# Altium PCB ThreadModule.PcbDoc (part 1 of 2)
Units mm, origin at the board's own origin, x right, y up, seen from the top; angles counter-clockwise.
Board outline 40 x 67.5 mm, 4 copper layers (SIG1, PLANE1, SIG3, SIG4), stack 1.58 mm thick; 114 components, 89 nets, 388 pads, 426 vias.
Unrouted connection lines stored in the file: 2.
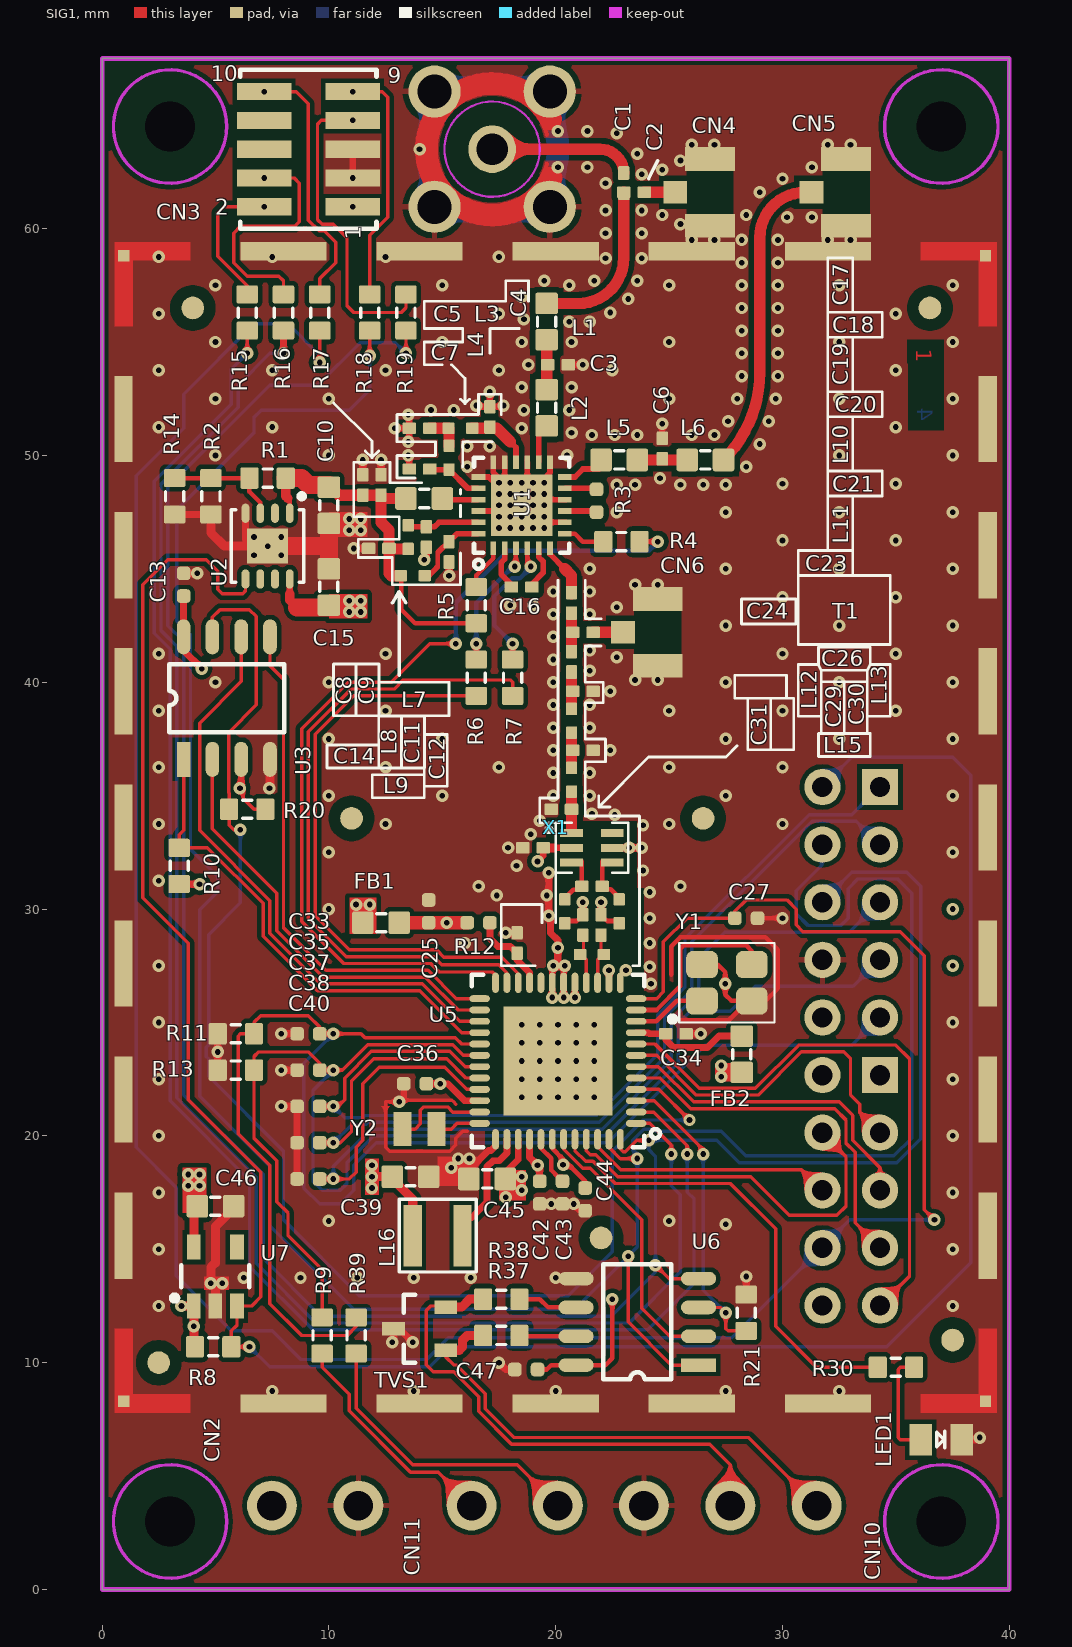
[diagram p0: SIG1 view]
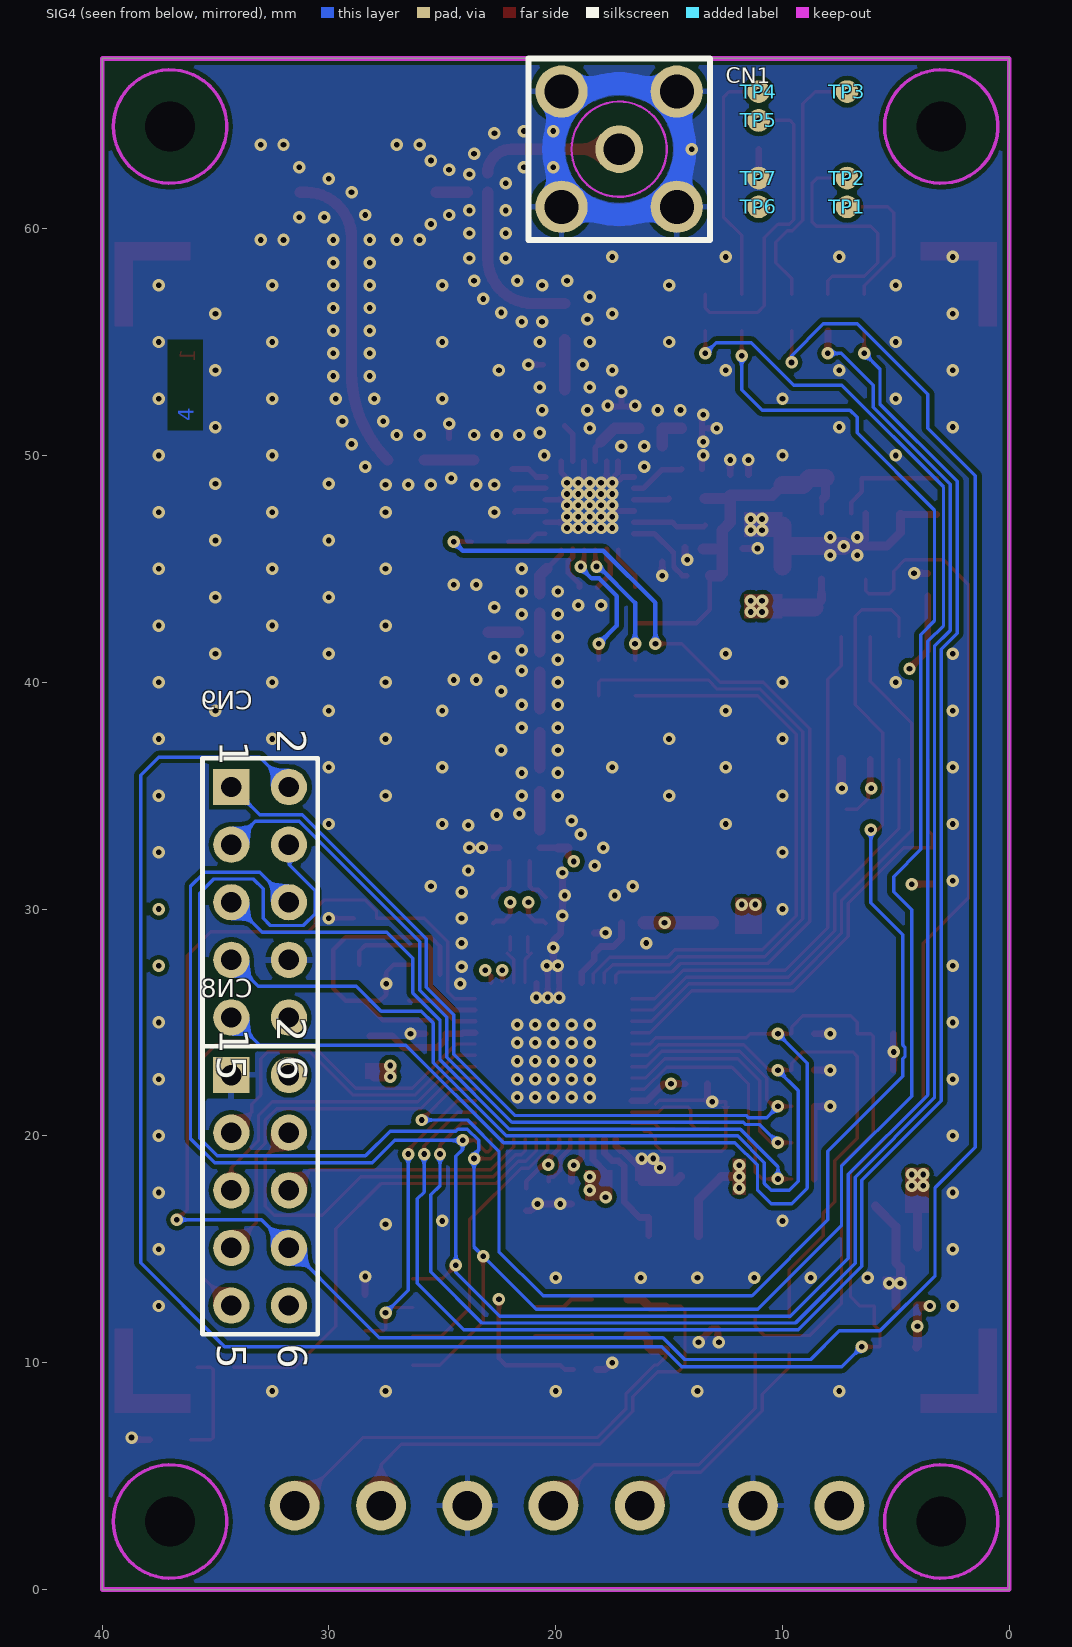
[diagram p1: SIG4 view, seen from below]
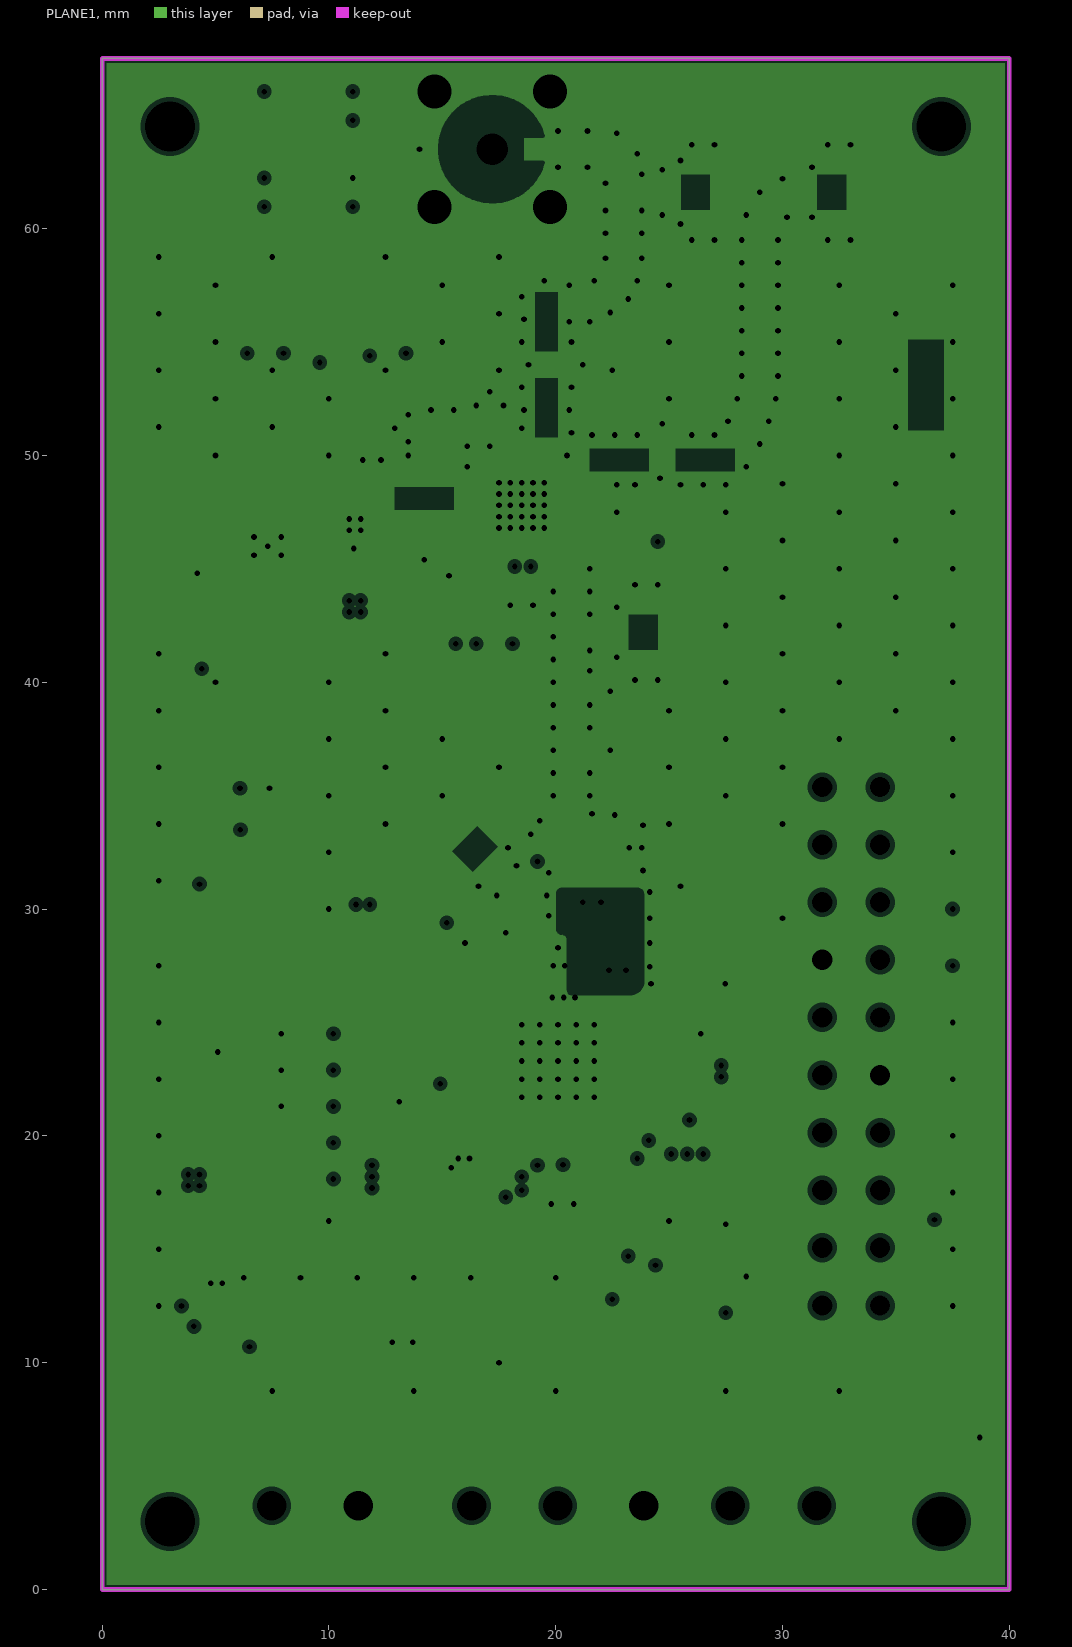
[diagram p2: PLANE1, clearances drawn from the general rule]
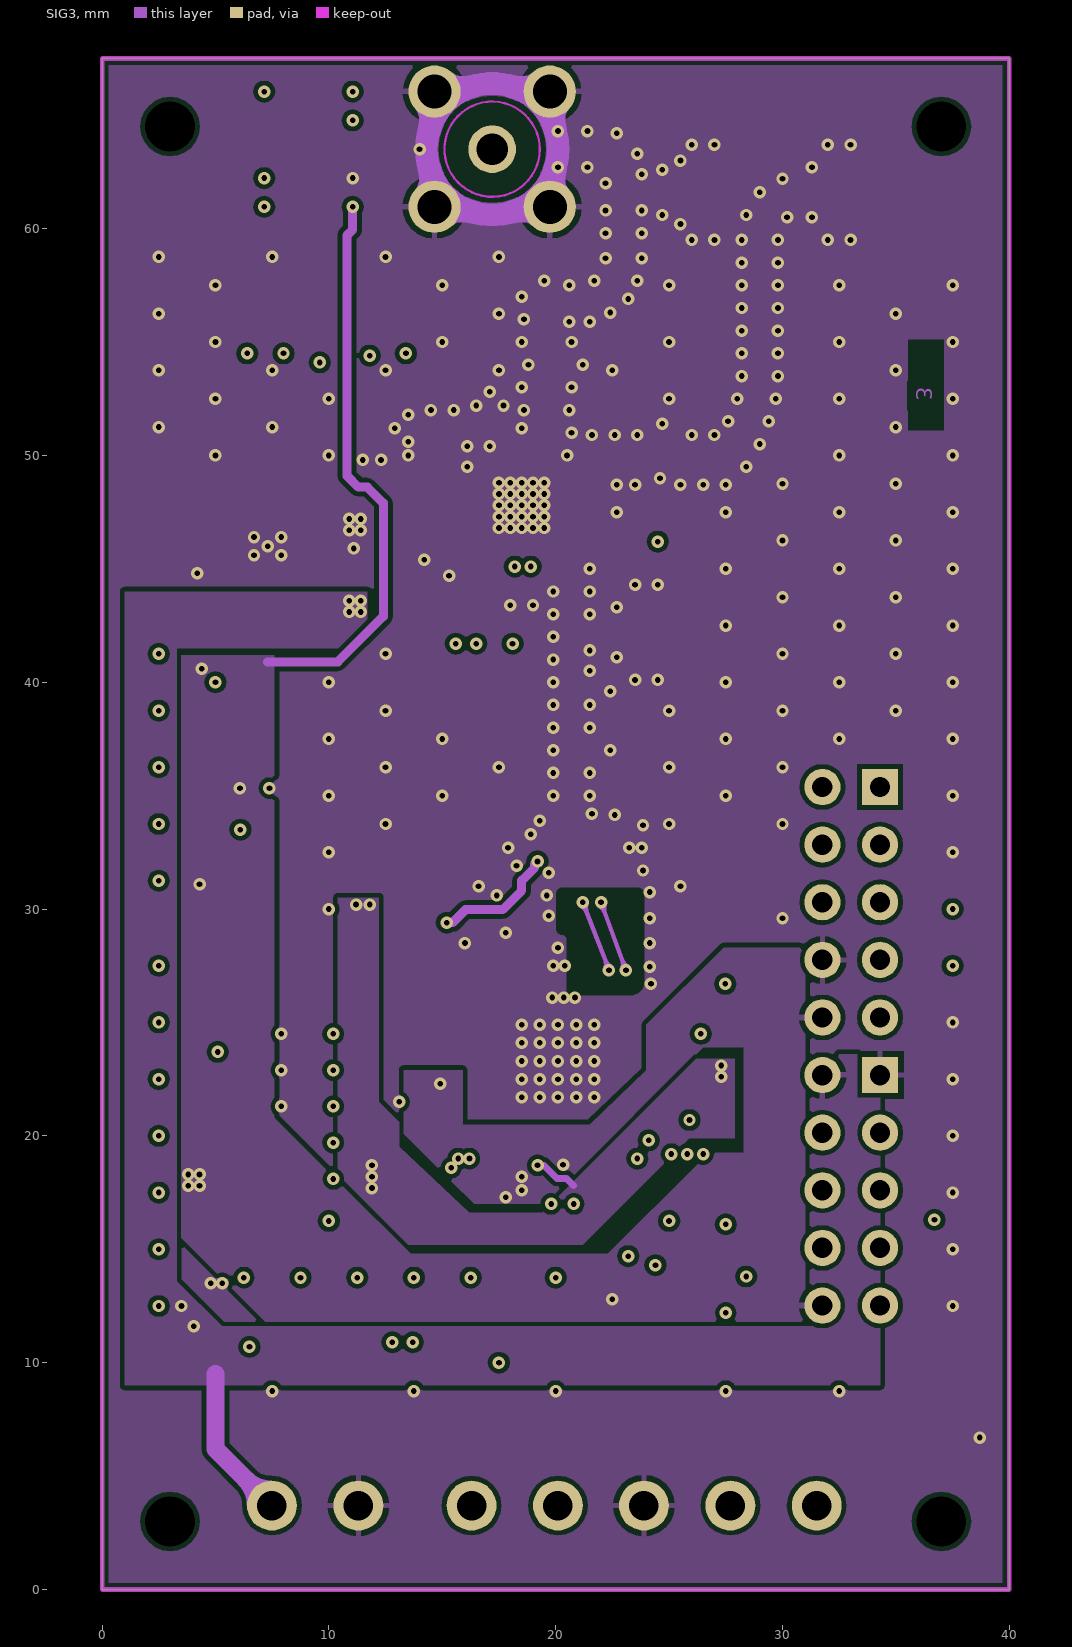
[diagram p3: SIG3]

## Layer stack, top to bottom
Top Solder: solder mask 0.01, Solder Resist, Dk 3.5
SIG1: signal copper 0.036
Dielectric 1: prepreg 0.3, FR-4, Dk 4.2
PLANE1: plane copper 0.018, net GND
Dielectric 2: core 0.872, Dk 4.2
SIG3: signal copper 0.018
Dielectric 3: prepreg 0.3, Dk 4.2
SIG4: signal copper 0.036
Bottom Solder: solder mask 0.01, Solder Resist, Dk 3.5

## Board outline
0,0 40,0 40,67.5 0,67.5

## Design rules (kind name [scope] priority, off if disabled: settings)
AssemblyTestpoint [(IsPad And (OnTopLayer Or OnBottomLayer)) Or (IsVia) Or (IsPad And OnMultiLayer)] p1: testpointundercomponent=FALSE minsize=0.5 maxsize=10 preferedsize=1 minholesize=0 maxholesize=1 preferedholesize=0 testpointgrid=0.025 usegrid=FALSE gridtolerance=0 allowsidebottom=TRUE
BoardOutlineClearance [All] p1: gap=0.2 ignorepadtopadclearanceinfootprint=FALSE
Clearance Clearance_RFO [WithinRoom('ROOM_RFO')] p1: gap=0.125 ignorepadtopadclearanceinfootprint=FALSE
Clearance Clearance_RF [InNet('ANT') or InNet('RF*') vs InNet('GND')] p2: gap=0.25 ignorepadtopadclearanceinfootprint=FALSE
Clearance Clearance_Poly [Inpolygon] p3: gap=0.2 ignorepadtopadclearanceinfootprint=FALSE
Clearance Clearance_General [All] p4: gap=0.15 ignorepadtopadclearanceinfootprint=FALSE
ComponentClearance [All] p1: gap=0.2 collisioncheckmode=3 verticalgap=0.25 showdistances=TRUE
HoleSize [All] p1: absolutevalues=TRUE maxlimit=3.2 minlimit=0.2 maxpercent=80.000 minpercent=20.000
HoleToHoleClearance [All] p1: gap=0.25 allowstackedmicrovias=TRUE
MinimumSolderMaskSliver [All] p1: minsoldermaskwidth=0.05
NetAntennae [not IsTestpoint] p1: netantennaetolerance=0
PlaneClearance [All] p1: clearance=0.2
PlaneConnect PlaneConnect_1 [(ObjectKind = 'Pad') And (Component = 'CN1')] p1: planeconnectstyle=Direct reliefexpansion=0.508 reliefentries=4 reliefconductorwidth=0.254 reliefairgap=0.254
PlaneConnect [not ((ObjectKind = 'Pad') And (Component = 'CN1'))] p2: pad.planeconnectstyle=Relief pad.reliefexpansion=0.5 pad.reliefentries=4 pad.reliefconductorwidth=0.25 pad.reliefairgap=0.25 via.planeconnectstyle=Direct via.reliefexpansion=0.508 via.reliefentries=4 via.reliefconductorwidth=0.254 via.reliefairgap=0.254
PolygonConnect [All] p1: thpad.connectstyle=Relief thpad.reliefconductorwidth=0.25 thpad.reliefentries=4 thpad.polygonreliefangle="90 Angle" thpad.airgapwidth=0.25 smdpad.connectstyle=Direct smdpad.reliefconductorwidth=0.254 smdpad.reliefentries=4 smdpad.polygonreliefangle="90 Angle" smdpad.airgapwidth=0.254 via.connectstyle=Direct via.reliefconductorwidth=0.254 via.reliefentries=4 via.polygonreliefangle="90 Angle" via.airgapwidth=0.254
RoomDefinition ThreadModule [InComponentClass('ThreadModule')] p1: confinementstyle=ConfineIn formatcopy=TRUE lockcomponents=FALSE outline 19.4,30 22.8,30 22.8,25.8 19.4,25.8
RoutingVias [All] p1: holewidth=0.25 width=0.55 viastyle="Through Hole" minholewidth=0.25 minwidth=0.55 maxholewidth=0.25 maxwidth=0.55
SilkToSolderMaskClearance [IsPad] p1: minsilkscreentomaskgap=0.1 clearancetoexposedcopper=TRUE
SolderMaskExpansion SolderMaskExpansion_TP_BOTTOM [isvia AND TestpointBottom] p1: expansion=-100 istentingtop=FALSE useseparateexpansions=TRUE expansionbottom=0 istentingbottom=FALSE
SolderMaskExpansion SolderMaskExpansion_Via [isvia and not IsTestpoint] p2: expansion=-100 istentingtop=FALSE
SolderMaskExpansion SolderMaskExpansion_General [All] p3: expansion=0.1 istentingtop=FALSE
Width [All] p1: maxlimit=2 minlimit=0.15 preferedwidth=0.15 minimp=50.000000 maximp=50.000000 favimp=50.000000
21 further rules are at their usual default settings.

## Components (designator, comment, footprint, x,y, rotation, side; value= is the part's Value field where it differs from the comment)
C1 "TBD TBD 5% C0G" CAPC1005X55L 23,62 r270 top value=TBD
C2 "TBD TBD 5% C0G" CAPC1005X55L 23.45,61.6 r0 top value=TBD
C3 "3.3pF 16V 5% C0G" CAPC1005X55L 20.1,54 r180 top value=3.3pF
C4 "3.3pF 16V 5% C0G" CAPC1005X55L 17.1,51.7 r90 top value=3.3pF
C5 "10pF 50V 5% C0G" CAPC1005X55L 14,51.2 r180 top value=10pF
C6 "3.3pF 16V 5% C0G" CAPC1005X55L 24.7,50.3 r270 top value=3.3pF
C7 "TBD TBD 5% C0G" CAPC1005X55L 14,49.4 r180 top value=TBD
C8 "1nF 16V 20% X7R" CAPC1005X55L 11.5,48.7 r270 top value=1nF
C9 "33pF 50V 5% C0G" CAPC1005X55L 12.3,48.7 r270 top value=33pF
C10 "4.7uF 6.3V 20% X5R" CAPC1608X90N 10,47.8 r270 top value=4.7uF
C11 "22pF 50V 5% C0G" CAPC1005X55L 14.3,46.4 r90 top value=22pF
C12 "100pF 50V 5% C0G" CAPC1005X55L 15.3,45.75 r90 top value=100pF
C13 "0.1uF 25V 20% X5R" CAPC1005N 3.6,44.3 r90 top value=0.1uF
C14 "10nF 50V 20% X7R" CAPC1005X55L 12.2,45.9 r0 top value=10nF
C15 "4.7uF 6.3V 20% X5R" CAPC1608X90N 10,44.2 r90 top value=4.7uF
C16 "3.3pF 16V 5% C0G" CAPC1005X55L 18.5,44.2 r0 top value=3.3pF
C17 "TBD TBD 5% C0G" CAPC1005X55L 20.7,43.5 r270 top value=TBD
C18 "TBD TBD 5% C0G" CAPC1005X55L 21.2,42.2 r0 top value=TBD
C19 "TBD TBD 5% C0G" CAPC1005X55L 20.7,40.9 r90 top value=TBD
C20 "TBD TBD 5% C0G" CAPC1005X55L 21.2,39.6 r0 top value=TBD
C21 "3.6pF 16V 5% C0G" CAPC1005X55L 21.2,37 r0 top value=3.6pF
C23 "3.6pF 16V 5% C0G" CAPC1005X55L 20.25,34.4 r180 top value=3.6pF
C24 "56pF 50V 5% C0G" CAPC1005X55L 19,32.7 r0 top value=56pF
C25 "0.22uF 10V 20% X7R" CAPC1005N 14.4,29.9 r270 top value=0.22uF
C26 "3.9pF 16V 5% C0G" CAPC1005X55L 21.6,31 r180 top value=3.9pF
C27 "0.1uF 25V 20% X5R" CAPC1005N 28.4,29.6 r180 top value=0.1uF
C29 "1.8pF 16V 5% C0G" CAPC1005X55L 21.2,29.3 r270 top value=1.8pF
C30 "1.8pF 16V 5% C0G" CAPC1005X55L 22,29.3 r270 top value=1.8pF
C31 "56pF 50V 5% C0G" CAPC1005X55L 18.3,28.5 r270 top value=56pF
C33 "0.1uF 25V 20% X5R" CAPC1005N 9.1,24.5 r0 top value=0.1uF
C34 "100pF 50V 5% C0G" CAPC1005X55L 25.3,24.5 r180 top value=100pF
C35 "0.1uF 25V 20% X5R" CAPC1005N 9.1,22.9 r0 top value=0.1uF
C36 "0.1uF 25V 20% X5R" CAPC1005N 13.8,22.3 r180 top value=0.1uF
C37 "0.1uF 25V 20% X5R" CAPC1005N 9.1,21.3 r0 top value=0.1uF
C38 "0.1uF 25V 20% X5R" CAPC1005N 9.1,19.7 r0 top value=0.1uF
C39 "4.7uF 6.3V 20% X5R" CAPC1608X90N 13.6,18.2 r0 top value=4.7uF
C40 "0.1uF 25V 20% X5R" CAPC1005N 9.1,18.1 r0 top value=0.1uF
C42 "0.1uF 25V 20% X5R" CAPC1005N 19.3,17.5 r90 top value=0.1uF
C43 "1uF 6.3V 20% X5R" CAPC1005N 20.3,17.5 r270 top value=1uF
C44 "1uF 6.3V 20% X5R" CAPC1005N 21.3,17.2 r270 top value=1uF
C45 "4.7uF 6.3V 20% X5R" CAPC1608X90N 16.975,18.1 r180 top value=4.7uF
C46 "4.7uF 6.3V 20% X5R" CAPC1608X90N 5,16.9 r0 top value=4.7uF
C47 "1uF 6.3V 20% X5R" CAPC1005N 18.7,9.7 r180 top value=1uF
CN1 "SMARA CONNECTOR" 0733910320 17.2,63.5 r270 bottom locked
CN2 "EK381-02P" EK381-02P 7.49,3.7 r0 top
CN3 "20021121-00010C4LF" HDR2X5 9.1,63.5 r90 top
CN4 "U.FL-R-SMT-1" U.FL-R-SMT-1 26.8,61.6 r270 top
CN5 "U.FL-R-SMT-1" U.FL-R-SMT-1 32.8,61.6 r270 top
CN6 "U.FL-R-SMT-1" U.FL-R-SMT-1 24.5,42.2 r270 top
CN8 "Header, Female, 2x5, 0.1\", Vertical" "HDR2x5-0.1\"-F" 33.03,17.6 r270 bottom locked
CN9 "Header, Female, 2x5, 0.1\", Vertical" "HDR2x5-0.1\"-F" 33.03,30.3 r270 bottom locked
CN10 "EK381-03P" EK381-03P 23.89,3.7 r0 top
CN11 "EK381-02P" EK381-02P 16.29,3.7 r0 top
FB1 "BLM18EG601SN1" INDC1608X95N 12.3,29.4 r0 top value=600Ohms@100MHz
FB2 "BLM18EG601SN1" INDC1608X95N 28.2,23.6 r270 top value=600Ohms@100MHz
L1 "LQG18HN6N8J00D" INDC1608X95N 19.6,55.9 r90 top value=6.8nH
L2 "LQG18HN6N8J00D" INDC1608X95N 19.6,52.1 r90 top value=6.8nH
L3 "LQG15HN3N0S02D" INDC1005X55L 15.8,51.2 r180 top value=3.0nH
L4 "LQG15HN1N3S02D" INDC1005X55L 15.3,49.9 r90 top value=1.3nH
L5 "LQG18HN6N8J00D" INDC1608X95N 22.8,49.8 r0 top value=6.8nH
L6 "LQG18HN6N8J00D" INDC1608X95N 26.6,49.8 r0 top value=6.8nH
L7 "LQG18HN6N8J00D" INDC1608X95N 14.2,48.1 r180 top value=6.8nH
L8 "LQG15HN4N7S02D" INDC1005X55L 13.5,46.4 r270 top value=4.7nH
L9 "LQW15AN3N3B8ZD" INDC1005X55L 13.7,44.7 r180 top value=3.3nH
L10 "TBD" INDC1005X55L 20.7,38.3 r90 top
L11 "LQW15AN9N1G8ZD" INDC1005X55L 20.7,35.7 r90 top value=9.1nH
L12 "LQW15AN3N3B8ZD" INDC1005X55L 20.4,29.9 r90 top value=3.3nH
L13 "LQW15AN3N3B8ZD" INDC1005X55L 22.8,29.9 r90 top value=3.3nH
L15 "LQW15AN18NG80D" INDC1005X55L 21.6,28 r0 top value=18nH
L16 "LQH3NPN4R7MJRL" INDW3030N 14.8,15.6 r180 top value=4.7uH/710mA
LED1 "LED, red" LEDC2012N 37,6.6 r0 top
R1 "100k 1% 63mW" RESC1608X40N 7.3,49 r0 top value=100k
R2 "68k 1% 63mW" RESC1608X40N 4.8,48.2 r90 top value=68k
R3 "0R 50mW" RESC1005X40N 21.8,48 r270 top value=0R
R4 "1k 1% 63mW" RESC1608X40N 22.9,46.2 r0 top value=1k
R5 "1k 1% 63mW" RESC1608X40N 16.5,43.4 r270 top value=1k
R6 "1k 1% 63mW" RESC1608X40N 16.5,40.2 r270 top value=1k
R7 "1k 1% 63mW" RESC1608X40N 18.1,40.2 r270 top value=1k
R8 "100k 1% 63mW" RESC1608X40N 4.9,10.7 r180 top value=100k
R9 "68k 1% 63mW" RESC1608X40N 9.7,11.2 r90 top value=68k
R10 "100k 1% 63mW" RESC1608X40N 3.4,31.9 r90 top value=100k
R11 "10k 1% 63mW" RESC1608X40N 5.9,24.5 r180 top value=10k
R12 "0R 50mW" RESC1005X40N 16.6,29.4 r0 top value=0R
R13 "10k 1% 63mW" RESC1608X40N 5.9,22.9 r180 top value=10k
R14 "120k 1% 63mW" RESC1608X40N 3.2,48.2 r90 top value=120k
R15 "47R 1%" RESC1608X40N 6.4,56.3 r270 top value=47R
R16 "47R 1%" RESC1608X40N 8,56.3 r270 top value=47R
R17 "47R 1%" RESC1608X40N 9.6,56.3 r270 top value=47R
R18 "47R 1%" RESC1608X40N 11.8,56.3 r270 top value=47R
R19 "47R 1%" RESC1608X40N 13.4,56.3 r270 top value=47R
R20 "100k 1% 63mW" RESC1608X40N 6.4,34.4 r180 top value=100k
R21 "100k 1% 63mW" RESC1608X40N 28.4,12.2 r270 top value=100k
R30 "390R 1% 63mW" RESC1608X40N 35,9.8 r0 top value=390R
R37 "10R 1% 63mW" RESC1608X40N 17.6,11.2 r0 top value=10R
R38 "10R 1% 63mW" RESC1608X40N 17.6,12.8 r0 top value=10R
R39 "68k 1% 63mW" RESC1608X40N 11.2,11.2 r90 top value=68k
T1 "0900BL15C050" BALC2012 21.6,32.7 r0 top
TP1 "Test point" TP 7.15,60.96 r90 bottom
TP2 "Test point" TP 7.15,62.23 r90 bottom
TP3 "Test point" TP 7.15,66.04 r90 bottom
TP4 "Test point" TP 11.05,66.04 r90 bottom
TP5 "Test point" TP 11.05,64.77 r90 bottom
TP6 "Test point" TP 11.05,60.96 r90 bottom
TP7 "Test point" TP 11.05,62.23 r90 bottom
TVS1 "PESD12VL2BT,215" SOT95P230X110-3N 14,11.5 r180 top value=12V
U1 "SE2435L-R" QFN50P400X400X90-25N 18.5,47.8 r90 top
U2 "LD59100PUR" SON65P300X300X90-9N-2 7.3,46 r270 top
U3 "MX25R1635FM1IL0" SOIC127P600X175-8N 5.5,39.3 r90 top
U5 "EFR32MG13P733F512GM48-C" QFN50P700X700X100-49N 20.1,23.3 r180 top
U6 "ST3485EBDR" SOIC127P600X175-8N 23.6,11.8 r180 top
U7 "MCP1711T-33I/OT" SOT95P284X122-5N 5,13.8 r90 top
X1 "2118732-2" 2118732 39.45,7.8 r90 top locked
Y1 "ECS-384-10-33B-CKY" XTAL3225X60N 27.55,26.75 r90 top value="38.4MHz 10ppm CL=10pF ESR=40ohm"
Y2 "CM8V-T1A-32.768kHz-12.5pF-20PPM-TA-QC" XTAL2.0x1.2 14,20.3 r180 top value="32.768kHz 12.5pF"

## Footprints (in the part's own frame and the unit in brackets; to place one, negate y for a bottom-side part, rotate by r counter-clockwise, add the part's x,y. Pads: shape width x height; smd on the part's side, far side on the other; paste and mask are expansions set on the pad)
2118732 [mm]
  rect 0.8x3.8 smd: 1(0.4,31.45) 1(0.4,25.45) 1(0.4,19.45) 1(0.4,13.45) 1(0.4,7.45) 1(51.2,7.45) 1(51.2,13.45) 1(51.2,19.45) 1(51.2,25.45) 1(51.2,31.45)
  rect 0.5x0.5 smd: 1(0.5,38.5) 1(0.5,0.5) 1(51,0.5) 1(51,38.5)
  rect 3.8x0.8 smd: 1(7.8,38.5) 1(7.8,0.4) 1(13.8,38.5) 1(13.8,0.4) 1(19.8,38.5) 1(19.8,0.4) 1(25.8,38.5) 1(25.8,0.4) 1(31.8,0.4) 1(31.8,38.5) 1(37.8,0.4) 1(37.8,38.5) 1(43.8,0.4) 1(43.8,38.5)
  SIG1 region: 51.6,0 47.9,0 47.9,0.8 50.8,0.8 50.8,3.35 51.6,3.35
  SIG1 region: 51.6,38.9 47.9,38.9 47.9,38.1 50.8,38.1 50.8,35.55 51.6,35.55
  SIG1 region: 0,38.9 3.7,38.9 3.7,38.1 0.8,38.1 0.8,35.55 0,35.55
  SIG1 region: 0,0 3.7,0 3.7,0.8 0.8,0.8 0.8,3.35 0,3.35
0733910320 [mm] "RPSMA"
  round 2.3 hole 1.5: 1(-2.54,2.54) 2(2.54,2.54) 3(2.54,-2.54) 4(-2.54,-2.54)
  round 2.1 hole 1.4: 5(0,0)
  silkscreen extent -4,-4 4,4, body extent -11.7,-3.2 3.2,3.2, height 9.6
BALC2012 [mm] "Chip Balun, Body 2.0x1.2mm, IPC Medium Density"
  rect 1x0.35 smd: 1(-0.9,0.65) 2(-0.9,0) 3(-0.9,-0.65) 4(0.9,-0.65) 5(0.9,0) 6(0.9,0.65)
  silkscreen extent -2,-1.1 1.6,1.1, body extent -0.7,-1.1 0.7,1.1, height 0.8
CAPC1005N [mm] "Chip Capacitor, Body 1.0x0.5mm, IPC Medium Density"
  rrect50% 0.6x0.6 smd: 1(-0.5,0) 2(0.5,0)
  body extent -0.5,-0.25 0.5,0.25, height 0.5
CAPC1005X55L [mm] "Chip Capacitor, Body 1.0x0.5mm, IPC Medium Density"
  rrect20% 0.6x0.5 smd mask+0.06: 1(-0.45,0) 2(0.45,0)
  body extent -0.5,-0.25 0.5,0.25, height 0.5
CAPC1608X90N [mm] "Chip Capacitor, Body 1.6x0.8mm, IPC Medium Density"
  rrect20% 0.95x1 smd: 1(-0.8,0) 2(0.8,0)
  silkscreen extent -0.2,-0.4 0.2,0.4, body extent -0.85,-0.48 0.85,0.48, height 0.9
EK381-02P [mm]
  round 2.2 hole 1.3: 1L(0,0) 2L(3.81,0)
EK381-03P [mm]
  round 2.2 hole 1.3: 1L(0,0) 2L(3.81,0) 3L(7.62,0)
HDR2X5 [mm] "Connector; Header; 4x2 Position"
  rect 0.76x2.4 smd: 1(-2.54,-1.95) 2(-2.54,1.95) 3(-1.27,-1.95) 4(-1.27,1.95) 5(0,-1.95) 6(0,1.95) 7(1.27,-1.95) 8(1.27,1.95) 9(2.54,-1.95) 10(2.54,1.95)
  silkscreen extent -3.5,-3 3.5,3, body extent -3.17,-2.8 3.17,2.7, height 4.7
"HDR2x5-0.1\"-F" [mm] "TH FEMALE PIN H8.1 P2.54"
  rect 1.6x1.6 hole 0.9: 1(-5.08,-1.27)
  round 1.6 hole 0.9: 2(-5.08,1.27) 3(-2.54,-1.27) 4(-2.54,1.27) 5(0,-1.27) 6(0,1.27) 7(2.54,-1.27) 8(2.54,1.27) 9(5.08,-1.27) 10(5.08,1.27)
  silkscreen extent -6.35,-2.54 6.35,2.54, body extent -6.35,-2.54 6.35,2.54, height 8.55
INDC1005X55L [mm] "Chip Inductor, Body 1.0x0.5mm, IPC Medium Density"
  rrect20% 0.55x0.5 smd mask+0.06: 1(-0.525,0) 2(0.525,0)
  body extent -0.5,-0.25 0.5,0.25, height 0.55
INDC1608X95N [mm] "Chip Inductor, Body 1.6x0.8mm, IPC Medium Density"
  rrect20% 0.95x1 smd: 1(-0.8,0) 2(0.8,0)
  silkscreen extent -0.2,-0.4 0.2,0.4, body extent -0.85,-0.48 0.85,0.48, height 0.95
INDW3030N [mm] "Inductor, Body 3.0x3.0mm, IPC Medium Density"
  rect 0.8x2.7 smd: 1(-1.1,0) 2(1.1,0)
  silkscreen extent -1.7,-1.6 1.7,1.6, body extent -1.6,-1.6 1.6,1.6, height 1.2
LEDC2012N [mm] "Chip LED, Body 2.0x1.3mm, IPC Medium Density"
  rect 1x1.4 smd: 1(-0.9,0) 2(0.9,0)
  silkscreen extent -0.2,-0.35 0.15,0.38, body extent -1.07,-0.7 1.07,0.7, height 0.65
QFN50P400X400X90-25N [mm] "QFN,0.50mm pitch,square;24 pin,4.00mm L X 4.00mm W X 0.85mm H body (w/thermal tab)"
  rect 2.7x2.7 smd paste-5 mask+0: 0(0,0)
  rect 0.6x0.25 smd paste+0 mask+0.07: 1(-1.9,1.25) 2(-1.9,0.75) 3(-1.9,0.25) 4(-1.9,-0.25) 5(-1.9,-0.75) 6(-1.9,-1.25) 13(1.9,-1.25) 14(1.9,-0.75) 15(1.9,-0.25) 16(1.9,0.25) 17(1.9,0.75) 18(1.9,1.25)
  rect 0.25x0.6 smd paste+0 mask+0.07: 7(-1.25,-1.9) 8(-0.75,-1.9) 9(-0.25,-1.9) 10(0.25,-1.9) 11(0.75,-1.9) 12(1.25,-1.9) 19(1.25,1.9) 20(0.75,1.9) 21(0.25,1.9) 22(-0.25,1.9) 23(-0.75,1.9) 24(-1.25,1.9)
  silkscreen extent -2.8,-2.1 2.1,2.1, body extent -2,-2 2,2, height 0.8
QFN50P700X700X100-49N [mm] "QFN,0.50mm pitch,square;48 pin,7.00mm L X 7.00mm W X 1.0mm H body (w/thermal tab)"
  rect 4.8x4.8 smd paste-50: 0(0,0)
  oval 0.9x0.3 smd paste-0.03 mask+0.07: 1(-3.45,2.75) 2(-3.45,2.25) 3(-3.45,1.75) 4(-3.45,1.25) 5(-3.45,0.75) 6(-3.45,0.25) 7(-3.45,-0.25) 8(-3.45,-0.75) 9(-3.45,-1.25) 10(-3.45,-1.75) 11(-3.45,-2.25) 12(-3.45,-2.75) 25(3.45,-2.75) 26(3.45,-2.25) 27(3.45,-1.75) 28(3.45,-1.25) 29(3.45,-0.75) 30(3.45,-0.25) 31(3.45,0.25) 32(3.45,0.75) 33(3.45,1.25) 34(3.45,1.75) 35(3.45,2.25) 36(3.45,2.75)
  oval 0.3x0.9 smd paste-0.03 mask+0.07: 13(-2.75,-3.45) 14(-2.25,-3.45) 15(-1.75,-3.45) 16(-1.25,-3.45) 17(-0.75,-3.45) 18(-0.25,-3.45) 19(0.25,-3.45) 20(0.75,-3.45) 21(1.25,-3.45) 22(1.75,-3.45) 23(2.25,-3.45) 24(2.75,-3.45) 37(2.75,3.45) 38(2.25,3.45) 39(1.75,3.45) 40(1.25,3.45) 41(0.75,3.45) 42(0.25,3.45) 43(-0.25,3.45) 44(-0.75,3.45) 45(-1.25,3.45) 46(-1.75,3.45) 47(-2.25,3.45) 48(-2.75,3.45)
  silkscreen extent -4.5,-3.8 3.8,3.8, body extent -3.6,-3.6 3.6,3.6, height 1
RESC1005X40N [mm] "Chip Capacitor, Body 1.0x0.5mm, IPC Medium Density"
  rrect50% 0.6x0.6 smd: 1(-0.5,0) 2(0.5,0)
  body extent -0.5,-0.25 0.5,0.25, height 0.4
RESC1608X40N [mm] "Chip Resistor, Body 1.6x0.8mm, IPC Medium Density"
  rrect20% 0.8x0.95 smd: 1(-0.8,0) 2(0.8,0)
  silkscreen extent -0.2,-0.4 0.2,0.4, body extent -0.85,-0.48 0.85,0.48, height 0.4
SOIC127P600X175-8N [mm]
  rect 1.55x0.6 smd: 1(-2.7,1.905)
  oval 1.55x0.6 smd: 2(-2.7,0.635) 3(-2.7,-0.635) 4(-2.7,-1.905) 5(2.7,-1.905) 6(2.7,-0.635) 7(2.7,0.635) 8(2.7,1.905)
  silkscreen extent -1.5,-2.54 1.5,2.54, body extent -2,-2.5 2,2.5, height 1.75
SON65P300X300X90-9N-2 [mm] "ST-DFN8"
  rect 1.55x1.8 smd paste-10: 0(0,0)
  oval 0.85x0.35 smd paste-0.03 mask+0.1: 1(-1.45,0.975) 2(-1.45,0.325) 3(-1.45,-0.325) 4(-1.45,-0.975) 5(1.45,-0.975) 6(1.45,-0.325) 7(1.45,0.325) 8(1.45,0.975)
  silkscreen extent -2.3,-1.6 1.6,1.6, body extent -1.5,-1.5 1.5,1.5, height 1.3
SOT95P230X110-3N [mm] "SOT23, 3-Leads, Body 2.9x1.3mm, Pitch 0.95mm, Lead Span 2.5mm, IPC Medium Density"
  rect 1x0.6 smd: 1(-1.15,0.95) 2(-1.15,-0.95) 3(1.15,0)
  silkscreen extent 0.2,-1.5 0.7,1.5, body extent -0.7,-1.5 0.7,1.5, height 1.1
SOT95P284X122-5N [mm] "SOT23, 5-Leads"
  rect 1.1x0.6 smd: 1(-1.3,0.95) 2(-1.3,0) 3(-1.3,-0.95) 4(1.3,-0.95) 5(1.3,0.95)
  silkscreen extent -1.07,-1.5 0.5,1.92, body extent -0.7,-1.5 0.7,1.5, height 1.1
TP [mm]
  round 1 smd paste-100: 1(0,0)
U.FL-R-SMT-1 [mm]
  rect 1x1.05 smd: 1(0,-1.525)
  rect 1.05x2.2 smd: 2(1.475,0) 3(-1.475,0)
  body extent -1.5,-1.53 1.5,1.57, height 1.25
XTAL2.0x1.2 [mm]
  rect 0.8x1.5 smd: 1(-0.75,0) 2(0.75,0)
  body extent -1,-0.6 1,0.6, height 0.6
XTAL3225X60N [mm] "Crystal, 3.2x2.5mm, H=0.6mm"
  rrect50% 1.2x1.4 smd: 1(-0.8,1.1) 2(-0.8,-1.1) 3(0.8,-1.1) 4(0.8,1.1)
  silkscreen extent -1.75,-2.1 1.75,2.52, body extent -1.3,-1.6 1.3,1.6, height 0.6

## Part data
C1 C2 C7 C17 C18 C19 C20: library part C_Dup1, "Capacitor, ceramic", TOLERANCE=5%, Voltage=TBD, Footprint Checked="Assign OK, Footprint OK", FP_DESC=C0402, MATERIAL=C0G, MFG=<GENERIC>, MFG_PN=<GENERIC>, Replacement Allowed=Yes, Symbol Checked=Ok
  C1 C17 C19: AssemblyComments="Mount 0R"
C3 C4 C6 C16 C21 C23 C26 C29 C30: library part C_Dup1, "Capacitor, ceramic", TOLERANCE=5%, Voltage=16V, Footprint Checked="Assign OK, Footprint OK", FP_DESC=C0402, MATERIAL=C0G, MFG=YAGEO, Replacement Allowed=Ask, Symbol Checked=Ok
  C3 C4 C6 C16: MFG_PN=CC0402BRNPO9BN3R3
  C21 C23: MFG_PN=CC0402BRNPO9BN3R6
  C26: MFG_PN=CC0402BRNPO9BN3R9
  C29 C30: MFG_PN=CC0402BRNPO9BN1R8
C5 C9 C11 C12 C24 C31 C34: library part C_Dup1, "Capacitor, ceramic", TOLERANCE=5%, Voltage=50V, Footprint Checked="Assign OK, Footprint OK", FP_DESC=C0402, MATERIAL=C0G, MFG=SAMSUNG, Replacement Allowed=Ask, Symbol Checked=Ok
  C5: MFG_PN=CL05C100DB5NNNC
  C9: MFG_PN=CL05C330JB5NNNC
  C11: MFG_PN=CL05C220JB5NNNC
  C12 C34: MFG_PN=CL05C101JB5NNNC
  C24 C31: MFG_PN=CL05C560JB5NNNC
C8: library part C_Dup1, "Capacitor, ceramic", TOLERANCE=20%, Voltage=16V, Footprint Checked="Assign OK, Footprint OK", FP_DESC=C0402, MATERIAL=X7R, MFG=SAMSUNG, MFG_PN=CL05B102KO5NNNC, Replacement Allowed=Ask, Symbol Checked=Ok
C10 C15 C39 C43 C44 C45 C46 C47: library part C_Dup1, "Capacitor, ceramic", TOLERANCE=20%, Voltage=6.3V, Footprint Checked="Assign OK, Footprint OK", MATERIAL=X5R, MFG=SAMSUNG, Replacement Allowed=Ask, Symbol Checked=Ok
  C10 C15 C39 C45 C46: FP_DESC=C0603, MFG_PN=CL10A475MQ8NNNC
  C43 C44 C47: FP_DESC=C0402, MFG_PN=CL05A105KQ5NNNC
C13 C27 C33 C35 C36 C37 C38 C40 C42: library part C_Dup1, "Capacitor, ceramic", TOLERANCE=20%, Voltage=25V, Footprint Checked="Assign OK, Footprint OK", FP_DESC=C0402, MATERIAL=X5R, MFG=SAMSUNG, MFG_PN=CL05A104KA5NNNC, Replacement Allowed=Ask, Symbol Checked=Ok
C14: library part C_Dup1, "Capacitor, ceramic", TOLERANCE=20%, Voltage=50V, Footprint Checked="Assign OK, Footprint OK", FP_DESC=C0402, MATERIAL=X7R, MFG=SAMSUNG, MFG_PN=CL05B103KB5NNNC, Replacement Allowed=Ask, Symbol Checked=Ok
C25: library part C_Dup1, "Capacitor, ceramic", TOLERANCE=20%, Voltage=10V, Footprint Checked="Assign OK, Footprint OK", FP_DESC=C0402, MATERIAL=X7R, MFG=SAMSUNG, MFG_PN=CL05B224KP5NNNC, Replacement Allowed=Ask, Symbol Checked=Ok
CN1: library part RPSMA, "SMA, Right angle", Footprint Checked="Assign OK, Footprint OK", FP_DESC="SMA, Right angle", MFG=LPRS, MFG_PN="SMARA CONNECTOR", Replacement Allowed=Ask, Symbol Checked=Ok
CN2 CN11: library part "Header 2", "Header, 2-Pin", Footprint Checked="Assign OK, Footprint OK", FP_DESC="Terminal block, Male, 2-pin", MFG=DINKLE, MFG_PN=EK381-02P, Replacement Allowed=Ask, Symbol Checked=Ok
CN3: library part "Header 5X2", "Connector Header Surface Mount 10 position 0.050\" (1.27mm)", Footprint Checked="Assign Ok, Footprint Ok", FP_DESC=HDR2x5, MFG=AMPHENOL, MFG_PN=20021121-00010C4LF, Replacement Allowed=Ask, Symbol Checked=Ok
CN4 CN5 CN6: "Ultra Small Surface Mount Coaxial Connectors - 1.9mm or 2.4mm Mated Height", Footprint Checked="Assign OK, Footprint OK", FP_DESC="U.FL connector", MFG=HIROSE, MFG_PN=U.FL-R-SMT-1, Replacement Allowed=Ask, Symbol Checked=Ok
CN8 CN9: library part "Header 5X2", Footprint Checked="Assign Ok, Footprint Ok", FP_DESC="Header, Female, 2x5, 0.1\", Vertical", MFG=<GENERIC>, MFG_PN=<GENERIC>, Replacement Allowed=Yes, Symbol Checked=Ok, System=Connector
CN10: library part "Header 3", "Header, 3-Pin", Footprint Checked="Assign OK, Footprint OK", FP_DESC="Terminal block, Male, 3-pin", MFG=DINKLE, MFG_PN=EK381-03P, Replacement Allowed=Ask, Symbol Checked=Ok
FB1 FB2: library part L, "Ferrite bead", Footprint Checked="Assign OK, Footprint OK", FP_DESC=L0603, MFG=MURATA, MFG_PN=BLM18EG601SN1, Replacement Allowed=No, Symbol Checked=Ok
L1 L2 L3 L4 L5 L6 L7 L8 L9 L10 L11 L12 L13 L15 L16: library part L, "Inductor", TOLERANCE=TBD%, Footprint Checked="Assign OK, Footprint OK", Symbol Checked=Ok
  L1 L2 L5 L6 L7: FP_DESC=L0603, MFG=MURATA, MFG_PN=LQG18HN6N8J00D, Replacement Allowed=No
  L3: FP_DESC=L0402, MFG=MURATA, MFG_PN=LQG15HN3N0S02D, Replacement Allowed=No
  L4: FP_DESC=L0402, MFG=MURATA, MFG_PN=LQG15HN1N3S02D, Replacement Allowed=No
  L8: FP_DESC=L0402, MFG=MURATA, MFG_PN=LQG15HN4N7S02D, Replacement Allowed=No
  L9 L12 L13: FP_DESC=L0402, MFG=MURATA, MFG_PN=LQW15AN3N3B8ZD, Replacement Allowed=No
  L10: AssemblyComments="Mount 0R", FP_DESC=L0402, MFG=TBD, MFG_PN=TBD, Replacement Allowed=Yes
  L11: FP_DESC=L0402, MFG=MURATA, MFG_PN=LQW15AN9N1G8ZD, Replacement Allowed=No
  L15: FP_DESC=L0402, MFG=MURATA, MFG_PN=LQW15AN18NG80D, Replacement Allowed=No
  L16: FP_DESC="Inductor, 3.0x3.0, H=1.2", MFG=MURATA, MFG_PN=LQH3NPN4R7MJRL, Replacement Allowed=No
LED1: library part "Led Red HSMC-C170", Footprint Checked="Assign OK, Footprint OK", FP_DESC=LED0805, MFG=<GENERIC>, MFG_PN=<GENERIC>, Replacement Allowed=Yes, Symbol Checked=Ok
R1 R2 R4 R5 R6 R7 R8 R9 R10 R11 R13 R14 R20 R21 R30 R37 R38 R39: library part R, "Resistor, SMD", POWER=63mW, TOLERANCE=1%, Footprint Checked="Assign OK, Footprint OK", FP_DESC=R0603, MFG=<GENERIC>, MFG_PN=<GENERIC>, Replacement Allowed=Yes, Symbol Checked=Ok
R3 R12: library part R, "Resistor, SMD", POWER=50mW, Footprint Checked="Assign OK, Footprint OK", FP_DESC=R0402, MFG=<GENERIC>, MFG_PN=<GENERIC>, Replacement Allowed=Yes, Symbol Checked=Ok
R15 R16 R17 R18 R19: library part Res, "Resistor, SMD", POWER=63mW, TOLERANCE=1%, Footprint Checked="Assign Ok, Footprint Ok", FP_DESC=R0603, MFG=<GENERIC>, MFG_PN=<GENERIC>, Replacement Allowed=Yes, Symbol Checked=Ok
T1: library part BALUN, "50:50 ohms Balun", Footprint Checked="Assign OK, Footprint OK", FP_DESC="0805 Balun", MFG=JOHANSON, MFG_PN=0900BL15C050, Replacement Allowed=No, Symbol Checked=Ok
TP1 TP2 TP3 TP4 TP5 TP6 TP7: library part TP
TVS1: library part NUP2105L, "TVS array", Footprint Checked="Assign OK, Footprint OK", FP_DESC=SOT23-3, MFG=NXP, MFG_PN=PESD12VL2BT,215, Replacement Allowed=No, Symbol Checked=Ok
U1: library part SE2435L, "860 to 930 MHz High-Power RF Front-End Module", Footprint Checked="Assign OK, Footprint OK", FP_DESC=QFN24+TAB, MFG=SKYWORKS, MFG_PN=SE2435L-R, Replacement Allowed=No, Symbol Checked=Ok
U2: library part LD59100, "1A ultra low-dropout regulator with reverse current protection", Footprint Checked="Assign OK, Footprint OK", FP_DESC=VDFN-8, MFG=ST, MFG_PN=LD59100PUR, Replacement Allowed=No, Symbol Checked=Ok
U3: library part AT45DB321C_CNC_0, "2.5V/3.0V 16 Mbit Serial Quad I/O (SQI) Flash Memory", Footprint Checked="Assign OK, Footprint OK", FP_DESC=SOIC8, MFG=MACRONIX, MFG_PN=MX25R1635FM1IL0, Replacement Allowed=No, Symbol Checked=Ok
U5: library part EFR32xG1_2.4G_SUBGHZ_QFN48, "Mighty Gecko Multi-Protocol Wireless SoC Family Data Sheet", Footprint Checked="Assign OK, Footprint OK", FP_DESC=QFN48, MFG=SILABS, MFG_PN=EFR32MG13P733F512GM48-C, Replacement Allowed=No, Symbol Checked=Ok
U6: library part SN75176BD, "Differential Bus Transceiver", Footprint Checked="Assign OK, Footprint OK", FP_DESC=SOIC-8, MFG=ST, MFG_PN=ST3485EBDR, Replacement Allowed=No, Symbol Checked=Ok
U7: library part XC6504, "Linear Voltage Regulator IC  1 Output  150mA SOT-25-5", Footprint Checked="Assign Ok, Footprint Ok", FP_DESC=SOT23-5, MFG=MICROCHIP, MFG_PN=MCP1711T-33I/OT, Replacement Allowed=No, Symbol Checked=Ok
X1: library part NO_PINS, "RF SHIELD 1.5\" X 2\" SMD", Footprint Checked="Assign OK, Footprint OK", FP_DESC="RF SHIELD 1.5\" X 2\" SMD", MFG=TE, MFG_PN=2118732-2, Replacement Allowed=Ask, Symbol Checked=Ok
Y1 Y2: library part CS10-12MHz, "Crystal", Footprint Checked="Assign OK, Footprint OK", Replacement Allowed=No, Symbol Checked=Ok
  Y1: FP_DESC="XTAL 3.2x2.5", MFG=ECS, MFG_PN=ECS-384-10-33B-CKY
  Y2: FP_DESC="XTAL 2.0x1.2", MFG="MICRO CRYSTAL AG", MFG_PN=CM8V-T1A-32.768kHz-12.5pF-20PPM-TA-QC

## Free pads (board coordinates)
  round 0 hole 2.2 unplated: 0(3,3) 0(3,64.5) 0(37,3) 0(37,64.5)
  round 1 smd paste-25.4 mask+0.5: FID1(2.5,10) FID1(4,56.5) FID1(11,34) FID1(22,15.5) FID1(26.5,34) FID1(36.5,56.5) FID1(37.5,11)

## Via types
v1: diameter 0.55, hole 0.25, SIG1 to SIG4, 426 vias

## Nets (pads, with @x,y where several pads share a name; then routed paths per layer and width w, separated by ;. In a path a pad name is that pad's centre, name@x,y a point inside that pad or via, vN(x,y) a via of type N, cw(c..) or ccw(c..) an arc to the next point about the centre after c; other vN are vias at no path point)
+3.3V: C13.1 C36.1 C44.1 C45.1 C46.1 C47.1 CN3.1 CN8.10 CN9.10 R10.1 R20.1 TP6.1 U3.3 U3.8 U5.34 U5.39 U5.42 U6.8 U7.5 | length 48.1
  SIG1 w0.15: v1(6.08,35.331) 6.225,35.186 6.225,34.875 6.7,34.4 R20.1@7.2,34.4
  SIG1 w0.2: C47.1@19.2,9.7 19.6,9.7 19.795,9.895 U6.8@20.9,9.895 22.195,9.895 22.5,10.2 v1(22.5,12.8) ; U5.42@19.85,19.85 19.85,19.452 20.325,18.977 v1(20.325,18.725) 20.577,18.725 21.3,18.002 C44.1@21.3,17.7
  SIG1 w0.3: R10.1@3.4,31.1 v1(4.3,31.1) ; C13.1@3.6,43.8 3.595,43.795 U3.8@3.595,42 3.595,41.405 v1(4.4,40.6) ; v1(6.08,35.331) 6.135,35.386 U3.3@6.135,36.6 ; C36.1@14.3,22.3 v1(14.915,22.3) 15.23,22.3 15.98,21.55 U5.34@16.65,21.55 ; C45.1@17.775,17.9 17.775,18.375 18.35,18.95 U5.39@18.35,19.85
  SIG1 w0.4: U7.5@4.05,15.1 4.05,16.85 C46.1@4.1,16.9
  SIG3 w0.4: 7.3,40.9 10.4,40.9 12.4,42.9 12.4,47.9 11.7,48.6 11.3,48.6 10.8,49.1 10.8,59.7 11.05,59.95 v1(11.05,60.96)
  other v1: 17.8,17.3 18.5,17.6 3.8,17.8 4.3,17.8 18.5,18.2 3.8,18.3 4.3,18.3
+4.0V: C8.2 C9.2 C10.1 C14.2 L7.2 L8.2 L9.2 R1.2 R5.2 U2.1 | length 17.4
  SIG1 w0.2: 8.188,48.112 8.275,48.025 U2.1@8.275,47.45 ; L9.2@13.175,44.7 13.2,44.675 13.2,43.2 13.8,42.6 R5.2@16.5,42.6
  SIG1 w0.4: R1.2@8.1,49 8.1,48.2 8.188,48.112
  SIG1 w0.5: C10.1@10,48.7 10.45,48.25 C8.2@11.5,48.25 C9.2@12.3,48.25 ; L9.2@13.175,44.7 12.75,44.7 12.65,44.8 C14.2@12.65,45.9 ; L7.2@13.4,48.1 12.45,48.1 C9.2@12.3,48.25 ; L8.2@13.5,45.875 12.675,45.875 C14.2@12.65,45.9 ; C9.2@12.3,48.25 12.3,47.05 12.65,46.7 C14.2@12.65,45.9
  SIG1 w0.8: R1.2@8.1,49 8.8,49 9.1,48.7 C10.1@10,48.7
ADC_CH1: C37.2 CN9.1 U5.31 | length 41.3
  SIG1 w0.15: C37.2@9.6,21.3 v1(10.2,21.3) ; v1@10.4,21.3 10.7,21.6 10.7,22.549 11.876,23.725 15.332,23.725 16.007,23.05 U5.31@16.65,23.05
  SIG4 w0.15: v1(10.2,21.3) 10.7,20.8 11.502,20.8 11.602,20.9 21.803,20.9 24.5,23.597 24.5,25.349 25.7,26.549 25.7,28.684 31.181,34.165 33.055,34.165 CN9.1@34.27,35.38
ADC_CH2: C38.2 CN9.3 U5.32 | length 42.9
  SIG1 w0.15: C38.2@9.6,19.7 v1(10.2,19.7) 10.5,19.7 11,20.2 11,22.424 11.976,23.4 15.197,23.4 16.047,22.55 U5.32@16.65,22.55
  SIG4 w0.15: v1(10.2,19.7) 11,20.5 11.626,20.5 11.726,20.6 21.927,20.6 24.8,23.473 24.8,25.224 26,26.424 26,28.56 31.305,33.865 33.245,33.865 CN9.3@34.27,32.84
ADC_CH3: C40.2 CN9.5 U5.33 | length 43
  SIG1 w0.15: C40.2@9.6,18.1 v1(10.2,18.1) 10.9,18.1 11.2,18.4 11.2,19.5 11.5,19.8 11.5,22.3 12.225,23.025 15.113,23.025 16.088,22.05 U5.33@16.65,22.05
  SIG4 w0.15: v1(10.2,18.1) 10.2,18.649 11.851,20.3 22.051,20.3 25.1,23.349 25.1,25.1 26.3,26.3 26.3,27.824 27.451,28.975 32.945,28.975 CN9.5@34.27,30.3
ADC_CH4: C35.2 CN9.7 R9.2 R13.1 U5.30 | length 60.1
  SIG1 w0.15: R9.2@9.7,12 9.7,14.1 8.2,15.6 8.2,16.6 7.7,17.1 7.7,18.9 6.7,19.9 R13.1@6.7,22.9 6.7,23.5 6.9,23.7 9.1,23.7 9.6,23.2 C35.2@9.6,22.9 10.592,22.9 11.717,24.025 15.456,24.025 15.931,23.55 U5.30@16.65,23.55
  SIG4 w0.15: v1(10.2,22.9) 9.3,22 9.3,18 9.7,17.6 10.5,17.6 10.8,17.9 10.8,18.825 11.975,20 22.176,20 25.4,23.224 25.4,24.976 25.924,25.5 27.7,25.5 28.8,26.6 33.11,26.6 CN9.7@34.27,27.76
ADC_CH5: C33.2 CN9.9 R11.1 R39.2 U5.29 | length 66.4
  SIG1 w0.15: R39.2@11.2,12 11.2,11.6 10.8,11.2 8.8,11.2 7.4,12.6 7.4,18.7 6,20.1 6,24.4 6.1,24.5 R11.1@6.7,24.5 6.7,25 7,25.3 9.1,25.3 9.6,24.8 C33.2@9.6,24.5 v1(10.2,24.5) 11.418,24.5 11.593,24.325 15.58,24.325 15.855,24.05 U5.29@16.65,24.05
  SIG4 w0.15: v1(10.2,24.5) 8.9,23.2 8.9,17.7 9.6,17 10.5,17 11.1,17.6 11.1,18.701 12.099,19.7 22.3,19.7 26.6,24 33.05,24 CN9.9@34.27,25.22
ANT: C1.1 CN1.5 | length 6.6
  SIG1 w0.5: CN1.5@17,63.5 19.3,63.5 21.95,63.5 cw(c21.95,62.45) C1.1@23,62.45
DVDD_DECOUPLE: C43.1 U5.41 | length 2.4
  SIG1 w0.2: U5.41@19.35,19.85 19.35,19.457 19.8,19.007 19.8,18.493 20.093,18.2 20.3,18.2 C43.1@20.3,18
FEM_ANTSEL: R4.2 U5.24 | length 39.3
  SIG1 w0.15: v1(15.6,41.7) 14.451,41.7 12.751,40 10.851,40 8.8,37.949 8.8,29.451 10.651,27.6 14.497,27.6 14.872,27.225 17.2,27.225 17.35,27.075 U5.24@17.35,26.75
  SIG1 w0.2: R4.2@23.7,46.2 v1(24.5,46.2)
  SIG4 w0.2: v1(15.6,41.7) 15.6,43.5 17.9,45.8 24.1,45.8 v1(24.5,46.2)
FEM_LNAEN: R6.2 U5.22 | length 26.2
  SIG1 w0.15: R6.2@16.5,39.4 11.1,39.4 9.4,37.7 9.4,29.7 10.9,28.2 14.746,28.2 15.071,27.875 17.625,27.875 18.35,27.15 U5.22@18.35,26.75
FEM_PAEN: R7.2 U5.23 | length 29
  SIG1 w0.15: U5.23@17.85,26.75 17.85,27.19 17.49,27.55 14.971,27.55 14.621,27.9 10.776,27.9 9.1,29.576 9.1,37.824 10.976,39.7 12.875,39.7 13.275,40.1 18,40.1 18.1,40 R7.2@18.1,39.4
FLASH_nCS: R10.2 U3.1 U5.28 | length 21.5
  SIG1 w0.15: U3.1@3.595,36.6 3.595,33.48 3.4,33.285 R10.2@3.4,32.7 4.649,32.7 7.1,30.249 7.1,28.8 9.5,26.4 14,26.4 15.85,24.55 U5.28@16.65,24.55
FLASH_nRESET: R20.2 U3.7 U5.4 | length 60.6
  SIG1 w0.15: U3.7@4.865,42 4.865,42.865 5.2,43.2 6.5,43.2 6.8,42.9 6.8,39 5.58,37.78 5.58,35.124 5.6,35.104 R20.2@5.6,34.4 5.6,33.7 5.8,33.5 v1(6.1,33.5) ; U5.4@23.55,22.05 24.55,22.05 v1(25.9,20.7)
  SIG4 w0.15: v1(6.1,33.5) 6.1,30.276 4.7,28.876 4.7,24.007 4.6,23.907 4.6,23.493 4.7,23.393 4.7,22.628 8,19.328 8,16.293 11.343,12.95 20.55,12.95 22.5,14.9 22.5,19.331 23.868,20.7 v1(25.9,20.7)